# Altium PCB RF_PCB2.PcbDoc
Units mm, origin at the board's own origin, x right, y up, seen from the top; angles counter-clockwise.
Board outline 90.81 x 90.33 mm, 2 copper layers (Top Layer, Bottom Layer); 39 components, 47 nets, 157 pads, 39 vias.
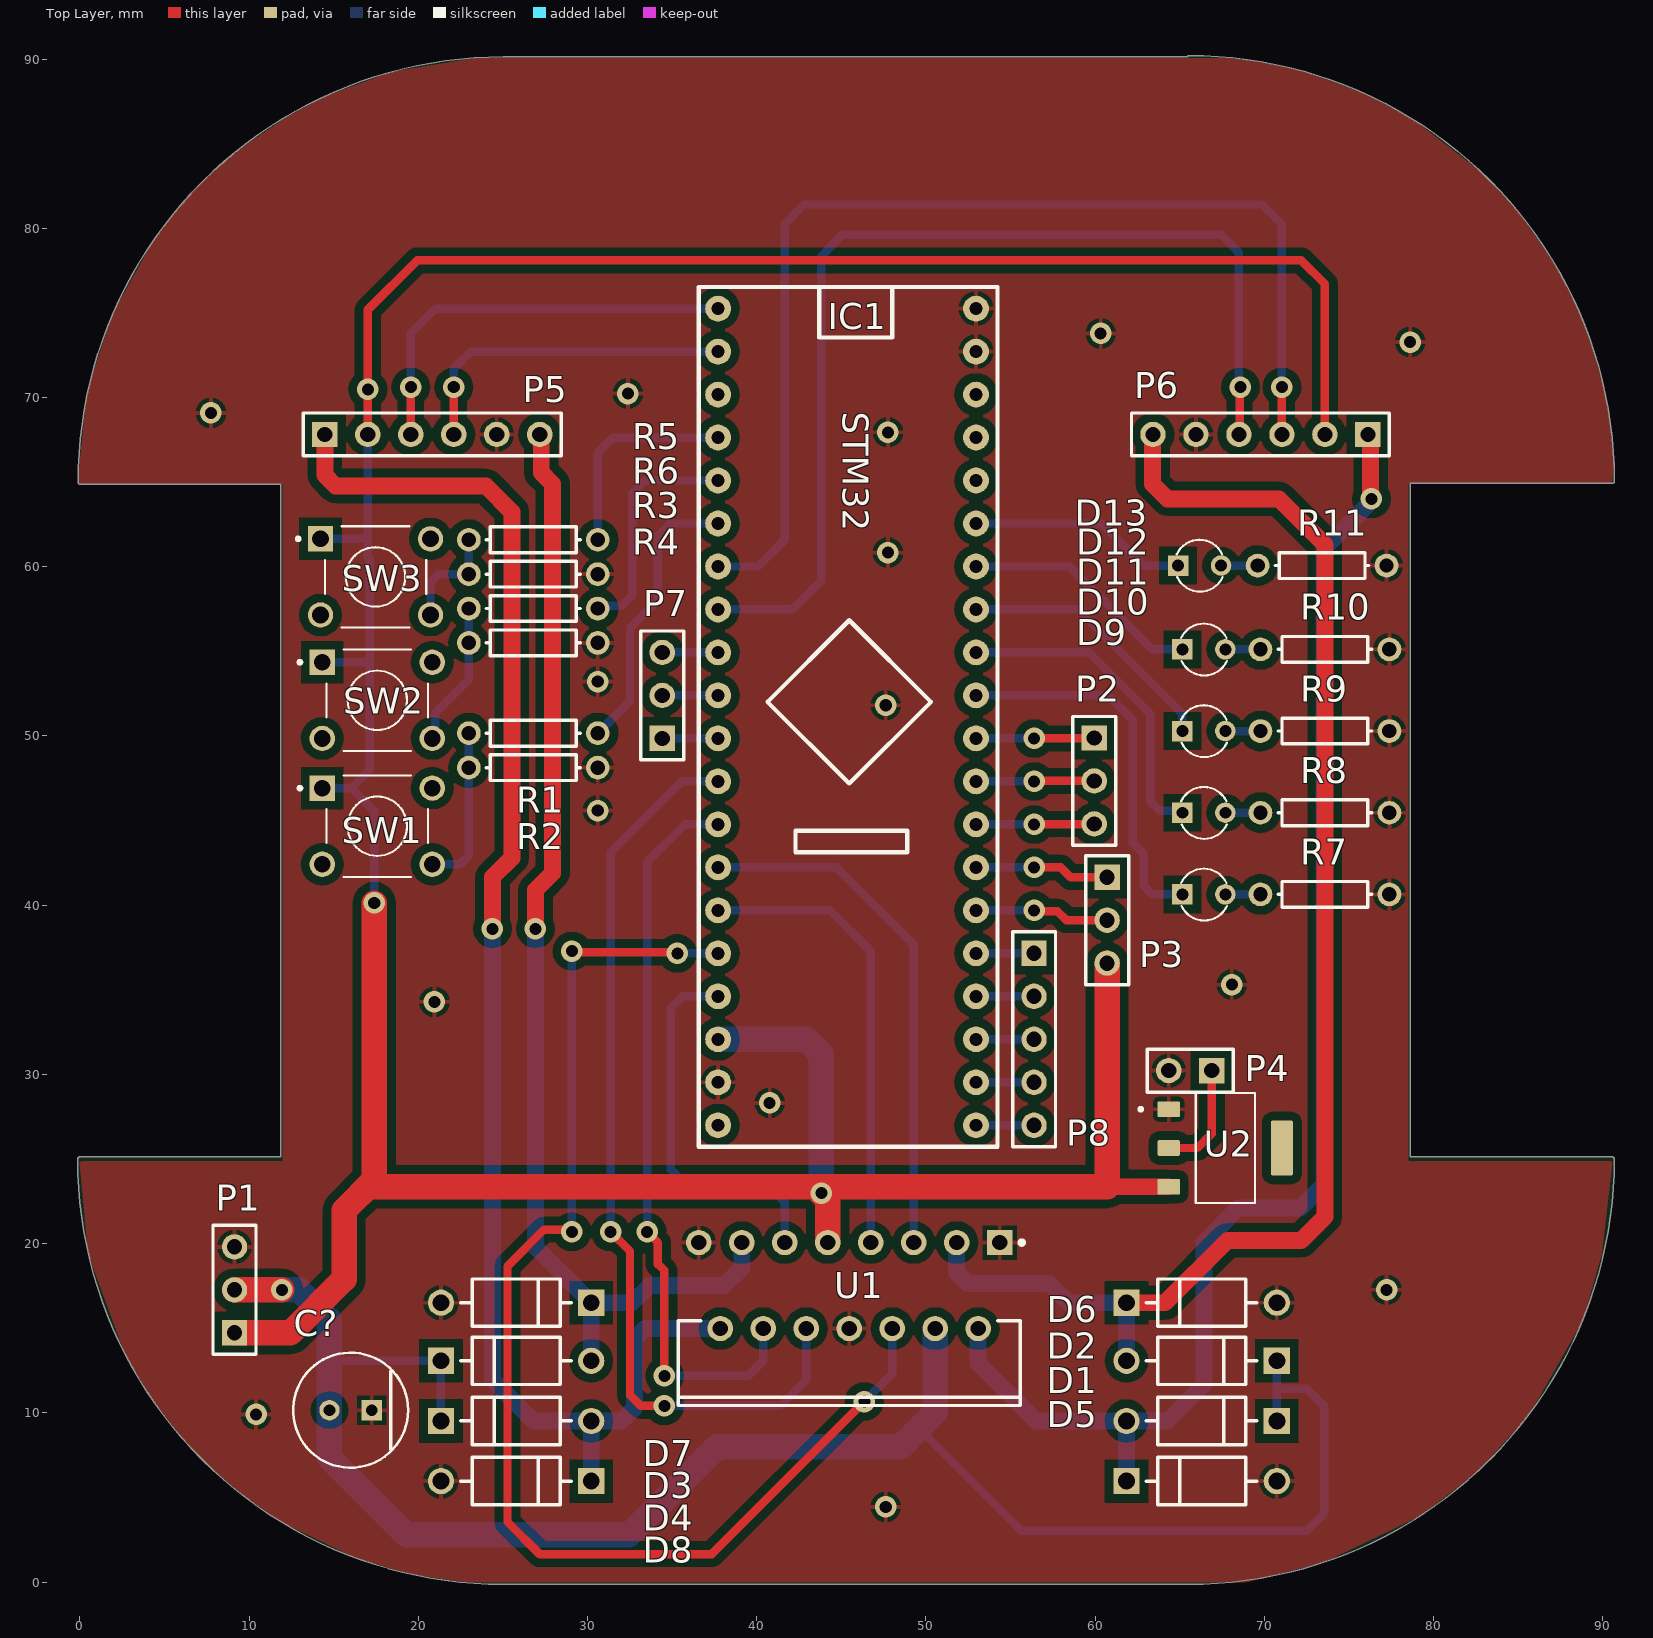
[diagram p0: Top Layer view]
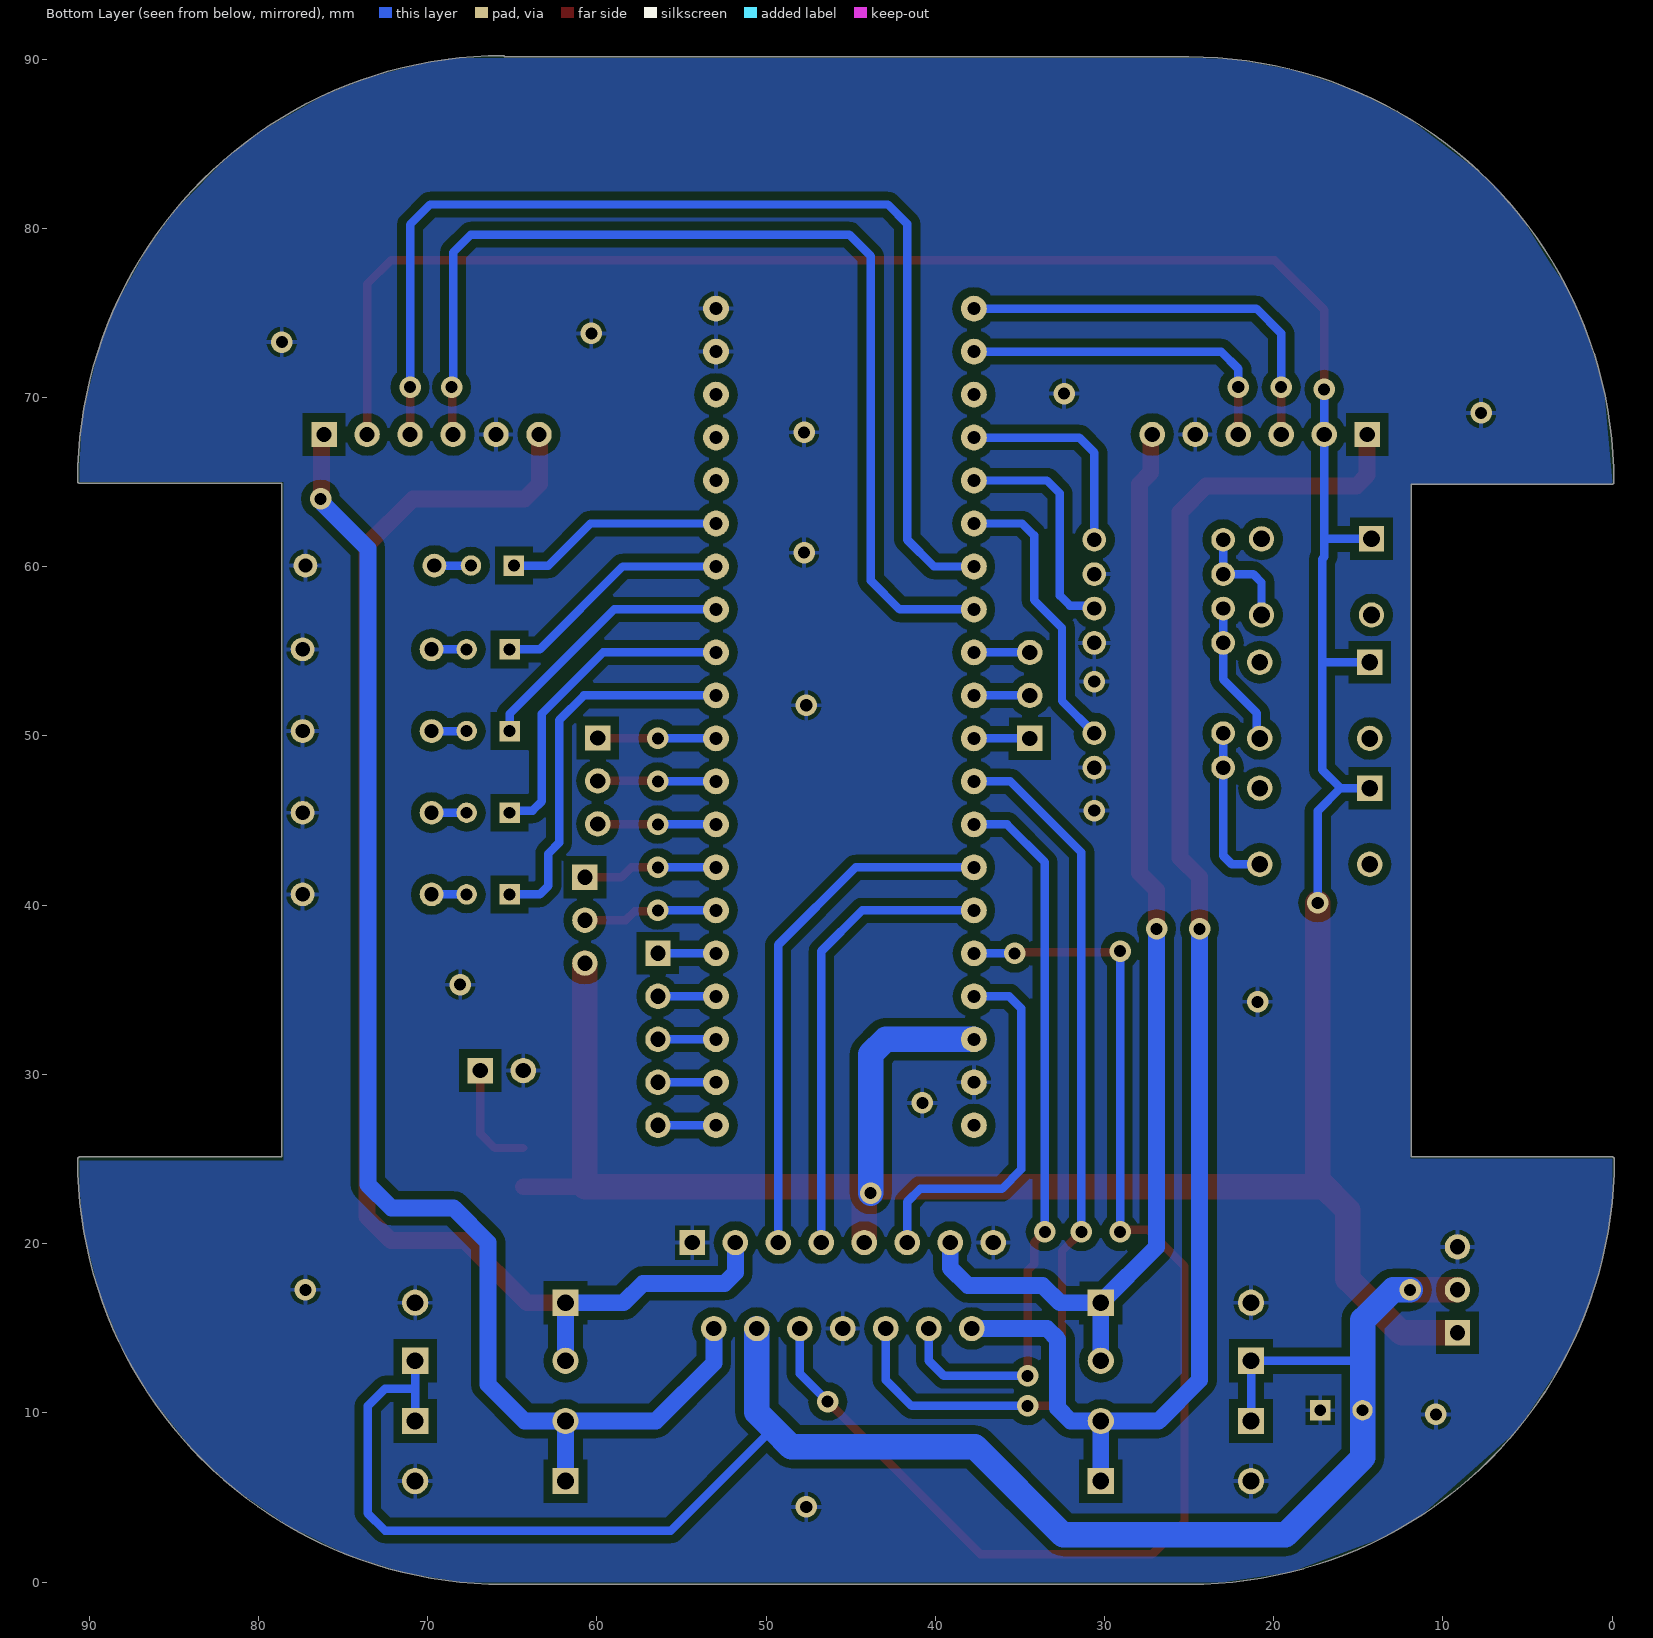
[diagram p1: Bottom Layer view, seen from below]

## Layer stack, top to bottom
Top Solder: solder mask 0.0102, Solder Resist, Dk 3.5
Top Layer: signal copper 0.0356
Dielectric 1: dielectric 0.32, FR-4, Dk 4.8
Bottom Layer: signal copper 0.0356
Bottom Solder: solder mask 0.0102, Solder Resist, Dk 3.5

## Board outline
-0.127,25 cw(c0,25) 0,25.127 11.873,25.127 11.873,64.873 0.024,64.873 cw(c0.024,65) -0.103,65 cw(c25.024,65) 25.024,90.127 65.435,90.127 cw(c65.551,90.075) 65.551,90.202 cw(c65.541,65.065) 90.678,65.065 cw(c65.541,65.065) 90.678,65.055 cw(c90.551,65.056) 90.523,64.931 cw(c90.495,65.056) 90.495,64.928 78.623,64.928 78.623,25.127 90.551,25.127 cw(c90.551,25) 90.678,25 cw(c90.551,25) 90.678,25 cw(c65.541,25.01) 65.532,-0.127 cw(c65.532,0) 65.531,-0.127 25,-0.127 cw(c25,25)

## Design rules (kind name [scope] priority, off if disabled: settings)
Clearance [All] p1: gap=0.5 ignorepadtopadclearanceinfootprint=TRUE
PolygonConnect [All] p1: connectstyle=Relief reliefconductorwidth=0.254 reliefentries=4 polygonreliefangle="90 Angle" airgapwidth=0.254
RoutingVias [All] p1: holewidth=0.711 width=1.27 viastyle="Through Hole" minholewidth=0.711 minwidth=1.27 maxholewidth=0.711 maxwidth=1.27
SolderMaskExpansion [All] p1: expansion=0.102
Width [All] p1: maxlimit=3 minlimit=0.254 preferedwidth=0.254
30 further rules are at their usual default settings.

## Classes and differential pairs
component class RF_SCH2: C? D1 D2 D3 D4 D5 D6 D7 D8 D9 D10 D11 D13 IC1 P1 P2 P3 P4 P5 P6 P7 P8 R1 R2 R4 R5 R6 R7 R8 R9 R10 R11 SW1 SW2 SW3 U1 U2

## Components (designator, comment, footprint, x,y, rotation, side; value= is the part's Value field where it differs from the comment)
C? "220uf" FP-RAD-TH-D_6_3_0_5-L_11-MFG 16.002,10.16 r180 top
D1 "1N4007" FP-1N4007-MFG 66.294,9.525 r180 top value=15pF
D2 "1N4007" FP-1N4007-MFG 66.294,13.081 r180 top value=15pF
D3 "1N4007" FP-1N4007-MFG 25.781,13.081 r0 top value=15pF
D4 "1N4007" FP-1N4007-MFG 25.781,9.525 r0 top value=15pF
D5 "1N4007" FP-1N4007-MFG 66.294,5.969 r0 top value=15pF
D6 "1N4007" FP-1N4007-MFG 66.294,16.51 r0 top value=15pF
D7 "1N4007" FP-1N4007-MFG 25.781,16.51 r180 top value=15pF
D8 "1N4007" FP-1N4007-MFG 25.781,5.969 r180 top value=15pF
D9 "OVLAW4CB7" LEDRD254W50D305H520P 66.421,40.64 r0 top
D10 "OVLAW4CB7" LEDRD254W50D305H520P 66.421,45.466 r0 top
D11 "OVLAW4CB7" LEDRD254W50D305H520P 66.421,50.292 r0 top
D12 "OVLAW4CB7" LEDRD254W50D305H520P 66.421,55.118 r0 top
D13 "OVLAW4CB7" LEDRD254W50D305H520P 66.167,60.071 r0 top
IC1 "STM32" PCBComponent_1 37.719,75.256 r270 top
P1 "Header 3" HDR1X3 9.144,14.732 r90 top
P2 "Header 3" HDR1X3 59.944,49.883 r270 top
P3 "Header 3" HDR1X3 60.706,41.656 r270 top
P4 "Header 2" HDR1X2 66.886,30.226 r180 top
P5 "MOTOR1" HDR1X6 14.478,67.818 r0 top
P6 "MOTOR2" HDR1X6 76.116,67.818 r180 top
P7 "Header 3" HDR1X3 34.417,49.856 r90 top
P8 "Header 5" HDR1X5 56.388,37.156 r270 top
R1 "Res1" AXIAL-0.3 26.797,50.165 r0 top value=100
R2 "Res1" AXIAL-0.3 26.797,48.133 r0 top value=10K
R3 "Res1" AXIAL-0.3 26.797,57.531 r0 top value=100
R4 "Res1" AXIAL-0.3 26.797,55.499 r0 top value=10K
R5 "Res1" AXIAL-0.3 26.797,61.595 r0 top value=100
R6 "Res1" AXIAL-0.3 26.797,59.563 r0 top value=10K
R7 "Res1" AXIAL-0.3 73.576,40.64 r0 top value=330
R8 "Res1" AXIAL-0.3 73.576,45.466 r0 top value=330
R9 "Res1" AXIAL-0.3 73.576,50.292 r0 top value=330
R10 "Res1" AXIAL-0.3 73.576,55.118 r0 top value=330
R11 "Res1" AXIAL-0.3 73.406,60.071 r0 top value=330
SW1 "1825910-2" TE_1825910-2 14.328,46.918 r0 top
SW2 "1825910-2" TE_1825910-2 14.328,54.356 r0 top
SW3 "1825910-2" TE_1825910-2 14.224,61.65 r0 top
U1 "L298N" STM-FM-15 45.466,17.526 r270 top
U2 "AMS1117-3.3" SOT229P700X180-4N 67.691,25.654 r0 top

## Footprints (in the part's own frame and the unit in brackets; to place one, negate y for a bottom-side part, rotate by r counter-clockwise, add the part's x,y. Pads: shape width x height; smd on the part's side, far side on the other; paste and mask are expansions set on the pad)
AXIAL-0.3 [mm] "Axial Device, Thru-Hole; 2 Leads; 0.3 in Pin Spacing"
  round 1.4 hole 0.85: 1(-3.81,0) 2(3.81,0)
  silkscreen extent -2.77,-0.76 2.77,0.76
FP-1N4007-MFG [mm]
  rect 1.55x1.55 hole 1 paste-1000 mask+0: 1(-4.44,0)
  round 1.55 hole 1 paste-1000 mask+0: 2(4.44,0)
  silkscreen extent -3.26,-1.4 3.26,1.4, body extent -5.32,-1.5 5.32,1.5, height 0.25
FP-RAD-TH-D_6_3_0_5-L_11-MFG [mm]
  rect 1.2x1.2 hole 0.7 paste-1000 mask+0: 1(-1.25,0)
  round 1.2 hole 0.7 paste-1000 mask+0: 2(1.25,0)
  silkscreen extent -3.4,-3.4 3.4,3.4, body extent -3.5,-3.5 3.5,3.5, height 0.25
HDR1X2 [mm] "Connector; Header; 2 Position"
  rect 1.5x1.5 hole 0.9: 1(0,0)
  round 1.5 hole 0.9: 2(2.54,0)
  silkscreen extent -1.27,-1.27 3.81,1.27
HDR1X3 [mm] "Connector; Header; 3 Position"
  rect 1.5x1.5 hole 0.9: 1(0,0)
  round 1.5 hole 0.9: 2(2.54,0) 3(5.08,0)
  silkscreen extent -1.27,-1.27 6.35,1.27
HDR1X5 [mm] "Connector; Header; 5 Position"
  rect 1.5x1.5 hole 0.9: 1(0,0)
  round 1.5 hole 0.9: 2(2.54,0) 3(5.08,0) 4(7.62,0) 5(10.16,0)
  silkscreen extent -1.27,-1.27 11.43,1.27
HDR1X6 [mm] "Connector; Header; 6 Position"
  rect 1.5x1.5 hole 0.9: 1(0,0)
  round 1.5 hole 0.9: 2(2.54,0) 3(5.08,0) 4(7.62,0) 5(10.16,0) 6(12.7,0)
  silkscreen extent -1.27,-1.27 13.97,1.27
LEDRD254W50D305H520P [mm]
  rect 1.208x1.208 hole 0.7: A(-1.27,0)
  round 1.208 hole 0.7: C(1.27,0)
  silkscreen extent -1.34,-1.54 1.36,1.52
PCBComponent_1 [mil]
  round 60 hole 30: 1(0,0) 2(100,0) 3(200,0) 4(300,0) 5(400,0) 6(500,0) 7(600,0) 8(700,0) 9(800,0) 10(900,0) 11(1000,0) 12(1100,0) 13(1200,0) 14(1300,0) 15(1400,0) 16(1500,0) 17(1600,0) 18(1700,0) 19(1800,0) 20(1900,0) 20(1900,0) 20(1900,0) 20(1900,0) 20(1900,0) 21(1900,600) 21(1900,600) 22(1800,600) 23(1700,600) 24(1600,600) 25(1500,600) 26(1400,600) 27(1300,600) 28(1200,600) 29(1100,600) 30(1000,600) 31(900,600) 32(800,600) 33(700,600) 34(600,600) 35(500,600) 36(400,600) 37(300,600) 38(200,600) 39(100,600) 40(0,600)
  silkscreen extent -50,-45 1950,650
SOT229P700X180-4N [mm]
  rrect15% 1.31x0.93 smd: 1(-3.345,2.29) 2(-3.345,0) 3(-3.345,-2.29)
  rrect15% 1.31x3.24 smd: 4(3.345,0)
  silkscreen extent -5.1,-3.25 1.75,3.25, body extent -3.5,-3.25 3.5,3.25, height 1.8
STM-FM-15 [mm] "FM, 15-Leads, Body 20.2x5mm, Pitch 1.27mm"
  rect 1.5x1.5 hole 0.9: 1(-2.54,8.89)
  round 1.5 hole 0.9: 2(2.54,7.62) 3(-2.54,6.35) 4(2.54,5.08) 5(-2.54,3.81) 6(2.54,2.54) 7(-2.54,1.27) 8(2.54,0) 9(-2.54,-1.27) 10(2.54,-2.54) 11(-2.54,-3.81) 12(2.54,-5.08) 13(-2.54,-6.35) 14(2.54,-7.62) 15(-2.54,-8.89)
  silkscreen extent -2.66,-10.1 7.09,10.32, body extent -2.8,-10.1 7.09,10.1, height 21
TE_1825910-2 [mm]
  rect 1.498x1.498 / inner round 1.498 / far side rect 1.498x1.498 hole 0.99: 1(0,0)
  round 1.498 hole 0.99: 2(6.5,0) 3(0,-4.5) 4(6.5,-4.5)
  silkscreen extent -1.42,-5.25 6.24,0.74

## Part data
C?: library part CMP-05427-000685-1, "Aluminum Electrolytic Capacitors (Radial Lead Type) AEC-Q200 Qualified 220uF ±20% 16V", Capacitance=220uF, Case/Package=Radial, Max Operating Temperature=105°C, Min Operating Temperature=-55°C, Package Quantity=2000, Ripple Current=180mA, Tolerance=20%, Voltage Rating=16V, Diameter=6.3mm, Height=11.2mm, Height - Seated (Max)=0.48inch, Lead/Base Style=Straight, Lead Diameter=0.5mm, Lead Pitch=5mm, Length=11.2mm, Life (Hours)=1000Hour, Mount="Through Hole", Packaging="Ammo Pack", Radiation Hardening=No, RoHS Compliant=Yes, Series=NHG, Termination=Radial, Voltage Rating (DC)=16V
D1 D2 D3 D4 D5 D6 D7 D8: library part CMP-123542-000001-1, "Rectifier diode 1000 V 1 A DO-41, ,", Capacitance=15pF, Forward Current=1A, Manufacturer=Diotec, Max Junction Temp=+175°C, Max Repetitive Reverse Voltage=1000V, Max Surge Forward Current=27A, Peak Reverse Current=5uA, Temperature="-50°C to +175°C", Temperature Range Low=-50°C, Automotive=No, Category=Diode, ComponentLink2Description=Datasheet, ComponentLink2URL=https://datasheet.octopart.com/1N4007-Diotec-datasheet-62346875.pdf, Device Class L1="Discrete Semiconductors", Device Class L2=Diodes, Device Class L3="Rectifier Diodes", Height=2.8mm, Ipc Land Pattern Name=DIOAD888W100L520D280, Lead Free=Yes, Manufacturer Part Number=1N4007, Octopart=https://octopart.com/1n4007-diotec-4040411, Package=1N4007, Reverse Voltage=1000V, RoHS=TRUE, Temperature Range High=+175°C
D9 D10 D11 D12 D13: "White LED Indication - Discrete 3.2V Radial", Package="Radial Optek", Availability=Unavailable, MF="TT Electronics/Optek", MP=OVLAW4CB7, Price=None, SnapEDA_Link=https://www.snapeda.com/parts/OVLAW4CB7/TT%20Electronics/Optek%20Technology/view-part/328075/?ref=snap
IC1: library part Component_1
P1 P2 P3 P7: "Header, 3-Pin", LatestRevisionDate=17-Jul-2002, LatestRevisionNote="Re-released for DXP Platform.", Publisher="Altium Limited"
P4: "Header, 2-Pin", LatestRevisionDate=17-Jul-2002, LatestRevisionNote="Re-released for DXP Platform.", Publisher="Altium Limited"
P5 P6: library part "Header 6", "Header, 6-Pin", LatestRevisionDate=17-Jul-2002, LatestRevisionNote="Re-released for DXP Platform.", Publisher="Altium Limited"
P8: "Header, 5-Pin", LatestRevisionDate=17-Jul-2002, LatestRevisionNote="Re-released for DXP Platform.", Publisher="Altium Limited"
R1 R2 R3 R4 R5 R6 R7 R8 R9 R10 R11: "Resistor", LatestRevisionDate=17-Jul-2002, LatestRevisionNote="Re-released for DXP Platform.", PackageDescription="Axial Device, Thru-Hole; 2 Leads; 0.3 in Pin Spacing", PackageReference=AXIAL-0.3, Published=8-Jun-2000, Publisher="Altium Limited"
SW1 SW2 SW3: "50 mA SPST Round Actuator 160 Gram Force Tactile Pushbutton Switch", Package=None, Availability="In Stock", Check_prices=https://www.snapeda.com/parts/1825910-2/TE+Connectivity+ALCOSWITCH+Switches/view-part/?ref=eda, EU_RoHS_Compliance=Compliant, MF="TE Connectivity", MP=1825910-2, Price=None, Purchase-URL=https://pricing.snapeda.com/search/part/1825910-2/?ref=eda, SnapEDA_Link=https://www.snapeda.com/parts/1825910-2/TE+Connectivity+ALCOSWITCH+Switches/view-part/?ref=snap
U1: library part CMP-2000-06526-1, "Dual Full-Bridge Driver, 4.8 to 46 V, -40 to 150 degC, 15-Pin FM (MW 15L), RoHS, Tube", Driver Case Style=Multiwatt, Manufacturer=STMicroelectronics, Operating Temperature Max=130°C, Operating Temperature Min=-25°C, Output Current=2A, Output Voltage=46V, Package Description="15-Pin Flange Mount, Body 5 x 19.6 mm, Pitch 1.27 mm", Package Reference=FM-15, PartNumber=L298, Supply Voltage Max=7V, Supply Voltage Min=4.5V, Automotive Qualification Standard=-, Datasheet URL=https://datasheet.ciiva.com/15109/getdatasheetpartid-50682-15109332.pdf, Datasheet Version=01/2000, Manufacturer URL=http://www.st.com/, Motor Type=FullBridge, Mounting Technology=ThroughHole, MSL=-, No. of Outputs=4Outputs, No. of Pins=15Pins, Packaging=Each, Product Range=-, SVHC=NoSVHC(17-Dec-2015)
U2: "Sot223/Pkg 1-Amp 3.3-Volt Low Drop Out Voltage Regulatator", Package="SOT-223 Seeed Technology", Availability="Not in stock", Check_prices=https://www.snapeda.com/parts/AMS1117-3.3/Advanced+Monolithic+Systems/view-part/?ref=eda, MF="Advanced Monolithic Systems", MP=AMS1117-3.3, Price=None, SnapEDA_Link=https://www.snapeda.com/parts/AMS1117-3.3/Advanced+Monolithic+Systems/view-part/?ref=snap

## Via types
v1: diameter 1.27, hole 0.711, Top Layer to Bottom Layer, 39 vias

## Nets (pads, with @x,y where several pads share a name; then routed paths per layer and width w, separated by ;. In a path a pad name is that pad's centre, name@x,y a point inside that pad or via, vN(x,y) a via of type N, cw(c..) or ccw(c..) an arc to the next point about the centre after c; other vN are vias at no path point)
3.3V: P4.1 U2.2 | length 6.6
  Top Layer w0.5: U2.2 66.04,25.654 66.886,26.5 P4.1
+5: IC1.18 P1.1 P3.3 P5.2 P6.2 SW1.1 SW2.1 SW3.1 U1.9 U2.3 | length 222.4
  Top Layer w0.5: P5.2 v1(17.018,70.485) 17.018,75.184 19.939,78.105 72.179,78.105 73.576,76.708 P6.2
  Top Layer w1: 60.706,23.364 U2.3
  Top Layer w1.5: P1.1 12.446,14.732 15.621,17.907 15.621,21.971 17.399,23.749 ; v1(17.399,40.132) 17.399,23.749 ; v1(43.815,22.987) 44.196,22.606 U1.9 ; P3.3 60.706,23.364 17.399,23.364 17.399,23.749
  Bottom Layer w0.5: SW3.1 17.018,61.65 ; SW1.1 16.057,46.918 ; SW2.1 17.145,54.356 ; v1(17.018,70.485) P5.2 17.018,61.65 ; v1(17.399,40.132) 17.399,45.576 16.057,46.918 ; 16.057,46.918 17.145,48.006 17.145,54.356 ; 17.018,61.65 17.018,60.579 17.145,60.452 17.145,54.356
  Bottom Layer w1.5: IC1.18 42.936,32.076 43.815,31.197 v1(43.815,22.987)
BTN1: IC1.6 R1.2 | length 17
  Bottom Layer w0.5: R1.2 32.512,52.07 32.512,56.388 34.163,58.039 34.163,61.849 34.87,62.556 IC1.6
BTN2: IC1.5 R3.2 | length 13.8
  Bottom Layer w0.5: R3.2 30.779,57.703 32.049,57.703 32.639,58.293 32.639,64.334 33.401,65.096 IC1.5
BTN3: IC1.4 R5.2 | length 12.6
  Bottom Layer w0.5: R5.2 30.607,66.747 31.496,67.636 IC1.4
EN_A: IC1.16 U1.6 | length 75.3
  Top Layer w0.5: v1@28.702,20.828 27.432,20.828 25.273,18.669 25.273,3.556 27.178,1.651 37.338,1.651 v1(46.355,10.668) ; v1(29.083,37.283) 29.146,37.219 35.242,37.219 v1(35.306,37.156)
  Bottom Layer w0.5: v1(29.083,20.701) v1(29.083,37.283) ; v1(35.306,37.156) IC1.16 ; v1(46.355,10.668) 48.006,12.319 U1.6
EN_B: IC1.17 U1.11 | length 22.5
  Bottom Layer w0.5: IC1.17 35.632,34.616 34.925,33.909 34.925,24.384 36.068,23.241 40.894,23.241 41.656,22.479 U1.11
ENCODER_A1: IC1.1 P5.3 | length 24.7
  Top Layer w0.5: P5.3 v1(19.558,70.612)
  Bottom Layer w0.5: v1(19.558,70.612) 19.558,73.787 21.027,75.256 IC1.1
ENCODER_A2: IC1.2 P5.4 | length 19.9
  Top Layer w0.5: P5.4 v1(22.098,70.612)
  Bottom Layer w0.5: v1(22.098,70.612) 22.098,71.7 23.114,72.716 IC1.2
ENCODER_B1: IC1.7 P6.3 | length 66
  Top Layer w0.5: P6.3 v1(71.036,70.612)
  Bottom Layer w0.5: IC1.7 40.077,60.016 41.656,61.595 41.656,80.264 42.799,81.407 69.85,81.407 71.036,80.221 v1(71.036,70.612)
ENCODER_B2: IC1.8 P6.4 | length 62.4
  Top Layer w0.5: P6.4 68.538,67.86 68.538,70.57 v1(68.58,70.612)
  Bottom Layer w0.5: IC1.8 42.109,57.476 43.815,59.182 43.815,78.359 45.085,79.629 67.437,79.629 68.496,78.57 v1@68.496,70.612
GND: C?.1 D5.2 D6.2 D7.2 D8.2 IC1.19 IC1.39 IC1.40 P1.3 P4.2 P5.5 P6.5 R2.2 R4.2 R6.2 R7.2 R8.2 R9.2 R10.2 R11.2 U1.1 U1.8 U1.15 U2.1
  other v1: 47.625,4.445 10.414,9.906 77.216,17.272 40.767,28.321 20.955,34.29 68.072,35.306 30.607,45.593 47.625,51.816 30.607,53.213 47.752,60.833 47.752,67.945 7.747,69.088 32.385,70.231 78.613,73.279 60.325,73.787
IR1: IC1.30 P2.1 | length 7
  Top Layer w0.5: v1(56.388,49.856) 59.916,49.856 P2.1
  Bottom Layer w0.5: IC1.30 v1(56.388,49.856)
IR2: IC1.29 P2.2 | length 7.1
  Top Layer w0.5: v1(56.388,47.316) 56.416,47.343 59.916,47.343 59.944,47.371 P2.2@59.972,47.371 ; P2.2 P2.2@59.972,47.371 ; P2.2@60.008,47.407 P2.2@59.972,47.371
  Bottom Layer w0.5: IC1.29 v1(56.388,47.316)
IR3: IC1.28 P2.3 | length 7
  Top Layer w0.5: v1(56.388,44.776) 56.402,44.79 59.93,44.79 P2.3
  Bottom Layer w0.5: IC1.28 v1(56.388,44.776)
IR4: IC1.27 P3.1 | length 8.1
  Top Layer w0.5: v1(56.388,42.236) 57.967,42.236 58.547,41.656 60.452,41.656 60.579,41.783 P3.1
  Bottom Layer w0.5: IC1.27 v1(56.388,42.236)
IR5: IC1.26 P3.2 | length 8
  Top Layer w0.5: v1(56.388,39.696) 56.448,39.636 57.773,39.636 58.293,39.116 P3.2
  Bottom Layer w0.5: IC1.26 v1(56.388,39.696)
LED1: D9.A IC1.31 | length 22.4
  Bottom Layer w0.5: IC1.31 60.761,52.396 62.23,50.927 62.23,43.688 62.865,43.053 62.865,41.148 63.373,40.64 D9.A
LED2: D10.A IC1.32 | length 19.2
  Bottom Layer w0.5: IC1.32@52.987,54.963 IC1.32 59.635,54.936 63.246,51.325 63.246,46.14 63.797,45.589 65.028,45.589 D10.A
LED3: D11.A IC1.33 | length 15.8
  Bottom Layer w0.5: IC1.33@52.995,57.44 IC1.33 58.983,57.476 65.151,51.308 D11.A
LED4: D12.A IC1.34 | length 14.2
  Bottom Layer w0.5: IC1.34 58.475,60.016 63.373,55.118 D12.A
LED5: D13.A IC1.35 | length 13
  Bottom Layer w0.5: IC1.35@52.995,62.52 IC1.35 60.38,62.556 62.865,60.071 D13.A
M_A_IN1: IC1.14 U1.5 | length 31
  Bottom Layer w0.5: IC1.14 44.704,42.236 49.276,37.664 U1.5
M_A_IN2: IC1.15 U1.7 | length 27.2
  Bottom Layer w0.5: IC1.15 44.323,39.696 46.736,37.283 U1.7
M_A_OUT1: D1.2 D5.1 P6.1 U1.2 | length 83.4
  Top Layer w1: P6.1 76.275,67.659 76.275,64.06 v1(76.327,64.008)
  Bottom Layer w1: U1.2 53.086,12.954 56.515,9.525 D1.2 ; D5.1 D1.2 ; v1@76.2,63.754 73.533,61.087 73.533,23.495 72.136,22.098 68.453,22.098 66.421,20.066 66.421,11.684 64.262,9.525 D1.2
M_A_OUT2: D2.2 D6.1 P6.6 U1.3 | length 84.1
  Top Layer w1: D6.1 64.135,16.51 67.818,20.193 72.179,20.193 73.576,21.59 73.576,61.298 70.866,64.008 64.283,64.008 63.394,64.897 63.394,67.796 P6.6
  Bottom Layer w1: U1.3 51.816,18.288 52.451,17.653 57.277,17.653 58.42,16.51 D6.1 D2.2
M_B_IN1: IC1.12 U1.10 | length 55
  Top Layer w0.5: v1(31.369,20.701) 32.512,19.558 32.512,11.049 33.147,10.414 v1(34.544,10.414)
  Bottom Layer w0.5: v1(31.369,20.701) 31.369,43.125 35.56,47.316 IC1.12 ; v1(34.544,10.414) 41.402,10.414 42.926,11.938 U1.10
M_B_IN2: IC1.13 U1.12 | length 44
  Top Layer w0.5: v1(33.528,20.701) 34.163,20.066 34.163,18.796 34.544,18.415 v1(34.544,12.192)
  Bottom Layer w0.5: v1(33.528,20.701) 33.528,42.545 35.759,44.776 IC1.13 ; v1(34.544,12.192) 39.497,12.192 40.386,13.081 U1.12
M_B_OUT1: D3.2 D7.1 P5.6 U1.13 | length 68.1
  Top Layer w1: v1(26.924,38.608) 26.924,40.894 27.94,41.91 27.94,64.897 27.269,65.568 27.269,67.727 P5.6
  Bottom Layer w1: v1(26.924,38.608) 26.924,19.807 D7.1 ; D3.2 D7.1 ; U1.13 39.116,18.566 38.076,17.526 33.655,17.526 32.639,16.51 D7.1
M_B_OUT2: D4.2 D8.1 P5.1 U1.14 | length 88.8
  Top Layer w1: P5.1 14.478,65.405 15.113,64.77 24.003,64.77 25.527,63.246 25.527,42.799 24.384,41.656 v1(24.384,38.608)
  Bottom Layer w1: v1(24.384,38.608) 24.384,11.938 26.797,9.525 D4.2 ; D8.1 D4.2 ; U1.14 33.401,14.986 32.766,14.351 32.766,10.287 32.004,9.525 D4.2
M_PWR: C?.2 D1.1 D2.1 D3.1 D4.1 P1.2 U1.4 | length 110.3
  Top Layer w1.5: P1.2 v1(11.938,17.272)
  Bottom Layer w0.5: 14.732,13.081 D3.1 D4.1 ; 49.593,9.08 55.626,3.048 72.517,3.048 73.533,4.064 73.533,10.414 72.517,11.43 70.734,11.43 ; D1.1 70.734,11.43 ; D2.1 70.734,11.43
  Bottom Layer w1.5: v1(11.938,17.272) 12.954,17.272 14.732,15.494 14.732,13.081 14.732,7.366 19.304,2.794 32.443,2.794 37.65,8.001 48.514,8.001 49.593,9.08 50.546,10.033 U1.4
NetD9_C: D9.C R7.1 | length 2.1
  Bottom Layer w0.5: D9.C R7.1
NetD10_C: D10.C R8.1 | length 2.1
  Bottom Layer w0.5: D10.C R8.1
NetD11_C: D11.C R9.1 | length 2.1
  Bottom Layer w0.5: D11.C R9.1
NetD12_C: D12.C R10.1 | length 2.1
  Bottom Layer w0.5: D12.C R10.1
NetD13_C: D13.C R11.1 | length 2.2
  Bottom Layer w0.5: D13.C R11.1
NetIC1_9: IC1.9 P7.3 | length 3.3
  Bottom Layer w0.5: P7.3 IC1.9
NetIC1_10: IC1.10 P7.2 | length 3.3
  Bottom Layer w0.5: P7.2 IC1.10
NetIC1_11: IC1.11 P7.1 | length 3.3
  Bottom Layer w0.5: P7.1 IC1.11
NetIC1_21: IC1.21 P8.5 | length 3.4
  Bottom Layer w0.5: IC1.21@52.959,26.996 P8.5
NetIC1_22: IC1.22 P8.4 | length 3.4
  Bottom Layer w0.5: IC1.22 P8.4
NetIC1_23: IC1.23 P8.3 | length 3.4
  Bottom Layer w0.5: IC1.23 P8.3
NetIC1_24: IC1.24 P8.2 | length 3.4
  Bottom Layer w0.5: IC1.24 P8.2
NetIC1_25: IC1.25 P8.1 | length 3.4
  Bottom Layer w0.5: IC1.25 P8.1
NetR1_1: R1.1 R2.1 SW1.4 | length 9.6
  Bottom Layer w0.5: SW1.4 22.479,42.418 22.987,42.926 R2.1 R1.1
NetR3_1: R3.1 R4.1 SW2.4 | length 8.6
  Bottom Layer w0.5: SW2.4 21.002,50.03 21.002,51.355 22.987,53.34 R4.1 R3.1
NetR5_1: R5.1 R6.1 SW3.4 | length 6.4
  Bottom Layer w0.5: SW3.4 20.724,59.078 21.209,59.563 R6.1 R5.1
pads on no net: IC1.3 IC1.20 IC1.36 IC1.37 IC1.38 SW1.2 SW1.3 SW2.2 SW2.3 SW3.2 SW3.3 U2.4

## Polygon pours and split planes (outlines as drawn)
GND on Bottom Layer (solid, pour order 23): 0,64.897 11.938,64.897 11.938,25.019 0,25.019 0,22.479 0.108,21.571 0.894,17.908 1.64,15.744 2.942,12.965 5.361,9.325 5.842,8.763 11.312,3.928 13.567,2.624 19.039,0.59 22.987,0 67.945,0 71.271,0.534 74.696,1.599 78.306,3.355 81.536,5.618 83.88,7.818 86.4,10.981 87.95,13.62 89.413,17.133 90.348,20.947 90.551,23.241 90.551,24.892 78.486,24.892 78.486,65.024 90.551,65.024 90.551,65.913 90.392,68.848 89.413,72.941 88.43,75.455 86.609,78.736 85.217,80.645 84.917,81.056 81.536,84.457 79.79,85.774 76.12,87.853 73.418,88.936 70.372,89.733 68.58,90.043 24.003,90.043 22.345,89.984 18.781,89.339 15.236,88.142 12.047,86.517 7.717,83.217 6.731,82.296 5.361,80.645 3.683,77.978 2.712,76.558 1.546,73.954 0.508,70.485
no net on Bottom Layer "Bottom Layer-No Net 2" (solid, pour order 20): 3.048,67.945
no net on Bottom Layer "Bottom Layer-No Net 3" (solid, pour order 18): 0.762,67.691
no net on Bottom Layer "Bottom Layer-No Net 1" (solid, pour order 12): 11.684,85.471
no net on Bottom Layer "Bottom Layer-No Net" (solid, pour order 8): 5.588,44.069
no net on Mechanical 1 (solid): 87.503,78.105
no net on Mechanical 1 (solid): 78.359,24.892
no net on Mechanical 1 (solid): 49.403,8.636
no net on Mechanical 1 (solid): 88.011,16.764
no net on Mechanical 1 (solid): 0,25 0,14.986 10.16,4.826 14.859,4.826 18.923,0.762 19.05,0.889 72.009,0.889
GND on Top Layer (solid, pour order 21): 78.551,24.873 90.551,24.873 89.937,19.401 88.803,15.482 86.231,10.92 85.295,9.464 82.469,6.427 79.248,3.937 73.523,1.173 68.961,0 22.983,-0.046 19.671,0.444 16.383,1.396 11.873,3.574 10.028,4.82 7.488,6.98 6.477,7.991 4.188,10.92 2.69,13.439 0.504,19.401 0,24.873 12,24.873 12,64.873 -0.116,64.873 0.429,70.382 1.953,74.956 4.365,79.303 6.477,82.042 9.073,84.415 12,86.409 14.201,87.677 18.419,89.244 23.241,90.043 66.421,90.043 68.072,90.043 69.821,89.835 72.416,89.244 76.075,87.888 78.819,86.409 82.817,83.325 85.086,80.872 87.366,77.537 88.651,74.956 89.937,71.125 90.311,69.344 90.678,66.167 90.519,64.929 78.495,64.929 78.495,24.929

## Silkscreen, mask and mechanical layers (free items; w line width, h text height)
Mechanical 1:
  lines w0.254: 12,65 12,25 0,25 ccw(c25,25) 25,0 65.532,0 ccw(c65.541,25.01) 90.551,25 78.551,25 ; 78.495,25.056 78.495,65.056